# Altium PCB PCB1.PcbDoc (part 3 of 4)
Units mm, origin at the board's own origin, x right, y up, seen from the top; angles counter-clockwise.
Board outline 200 x 55 mm, 4 copper layers (Top Layer, Power Layer, GND Layer, Bottom Layer), stack 1.714 mm thick; 404 components, 268 nets, 1339 pads, 777 vias.
Unrouted connection lines stored in the file: 18.
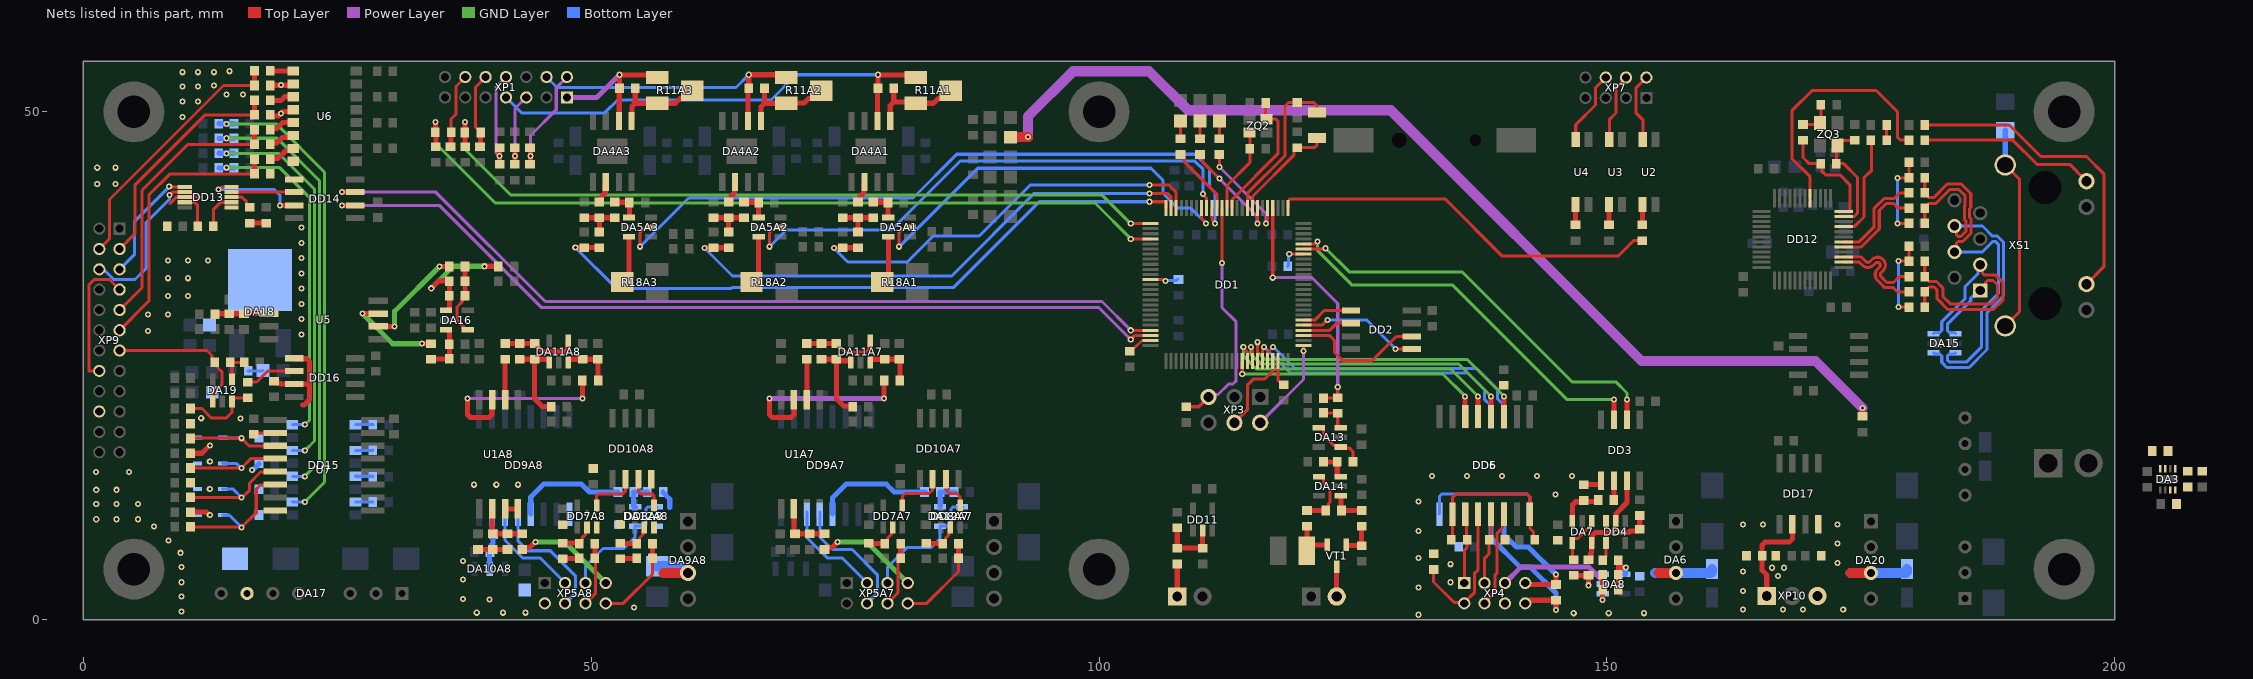
[diagram p5: the nets of this part, all layers, seen from the top]

## Via types
v1: diameter 0.6, hole 0.3, Top Layer to Bottom Layer, tented both sides, 735 vias
v2: diameter 0.6, hole 0.3, Top Layer to Bottom Layer, 36 vias
v3: diameter 0.8, hole 0.4, Top Layer to Bottom Layer, tented both sides, 4 vias
v4: diameter 0.2, hole 0.1, Top Layer to Bottom Layer, 2 vias

## Nets (pads, with @x,y where several pads share a name; then routed paths per layer and width w, separated by ;. In a path a pad name is that pad's centre, name@x,y a point inside that pad or via, vN(x,y) a via of type N, cw(c..) or ccw(c..) an arc to the next point about the centre after c; other vN are vias at no path point) (continued)
GND_DRVA8: C52A8.2 C53A8.2 C54A8.2 C55A8.1 C57A8.2 C58A8.2 C59A8.2 C62A8.1 C63A8.2 C64A8.2 C66A8.2 C67A8.2 C70A8.2 DA9A8.3 DA10A8.2 DA12A8.5 DD7A8.3 DD8A8.3 DD9A8.9 DD9A8.15 DD10A8.4 R31A8.1 R32A8.1 R36A8.2 U1A8.3 U1A8.4 XP5A8.2 | length 20.6
  Top Layer w0.5: C54A8.2@38.875,6.925 C55A8.1@40.325,6.925 R36A8.2@41.775,6.925 ; U1A8.3@41.535,10.925 U1A8.4@42.81,10.925 ; C52A8.2@47.225,6 47.25,6.025 48.8,6.025 R31A8.1@48.825,6.05 ; C53A8.2@52.875,6 52.9,6.025 54.475,6.025 R32A8.1@54.5,6.05
  Top Layer w1: 57.125,4.615 DA9A8.3@59.55,4.615
  Bottom Layer w0.5: DA10A8.2@40.025,5.025 40.025,5.1 C67A8.2@40.025,6.65 ; C67A8.2@40.05,6.725 C67A8.2@40.05,6.675 40.225,6.85 40.225,7.409 40.34,7.524 C64A8.2@40.34,8.36 ; DD9A8.15@40.26,10.4 40.26,8.44 C64A8.2@40.34,8.36 ; C64A8.2@40.375,8.325 C64A8.2@40.34,8.36 ; C64A8.2@40.4,8.425 40.34,8.365 C64A8.2@40.34,8.36 ; C66A8.2@57.1,12.575 57.1,12.525 57.75,11.875 57.75,11.075
  Bottom Layer w1: C57A8.2@56.525,5.275 58.728,5.275 59.388,4.615 DA9A8.3@59.55,4.615
  other v1: 38.75,0.7 41.325,0.7 43.55,0.7 54.225,1.2 40.025,2 37.4,2.05 37.4,3.95 37.4,5.775 49.6,10.475 38.5,13.3 40.675,13.3 42.825,13.3
GND_FS: C120.2 C121.2 C122.2 DA20.3 DD17.4 R121.2 XP10.3 | length 7.9
  Top Layer w1: 173.975,4.615 DA20.3@175.975,4.615
  Bottom Layer w1: 173.975,4.615 DA20.3@175.975,4.615 179.425,4.615 179.525,4.715 C122.2@179.525,5
  other v1: 163.375,1.025 167.325,1.025 169.3,1.025 173.25,1.025 163.375,2.85 166.825,4.3 163.375,4.775 166.25,5.125 167.425,5.125 172.7,5.6 172.7,7.5 163.375,9.375 165.35,9.375 172.7,9.375
GND_HW: C95.2 C96.2 C100.2 C101.2 C111.1 C112.2 C113.2 C114.2 DA17.7 DA18.2 DD13.1 DD13.8 DD14.5 DD15.2 DD15.8 DD16.5 DD16.7 R72.1 R73.1 R75.1 R76.1 R78.1 R79.1 R80.1 R82.1 R113.1 R115.1 R116.1 R117.1 R119.1 R120.1 U6.2 U6.4 U6.6 U6.8 VD4.2 VD5.2 VD6.2 VD7.2 XP9.7 XP9.16 XP9.20 | length 46.5
  Top Layer w0.3: XP9.16@1.6,24.5 0.6,24.5 0.6,33 1.1,33.5 2.6,33.5 XP9.7@3.6,32.5 ; 8.575,41 9.175,41.6 11.443,41.6 ; C101.2@16.764,18.4 DD15.2@18.9,18.4 ; R72.1@18.404,52.621 18.534,52.75 U6.2@20.68,52.75 U6.2@20.53,52.6
  Top Layer w0.5: R82.1@10.575,10.6 12.168,10.6 12.448,10.32 v1(12.475,10.32) ; R76.1@10.575,16.4 11.698,16.4 v1(12.477,17.179) ; C96.2@16.425,39.05 C100.2@18.025,39.05 ; R78.1@18.425,46.65 18.425,46.75 18.6,46.925 19.075,46.925 19.615,47.465 20.475,47.465 U6.6@20.68,47.67 ; R75.1@18.425,49.6 19.223,49.6 v1(19.475,49.85) 19.503,49.851 19.706,50.054 20.524,50.054 U6.4@20.68,50.21 ; R72.1@18.425,52.6 U6.2@20.53,52.6 ; C112.2@18.8,23.5 18.975,23.325 19.328,23.325 19.453,23.2 DD16.7@20.8,23.2 22.3,23.2 ; DD16.5@20.8,25.75 20.85,25.7 22.007,25.7 22.3,25.407 22.3,23.2 ; 21.582,21.125 21.741,21.125 22.3,21.684 22.3,23.2
  Bottom Layer w0.3: C113.2@16.25,24.5 17.665,24.5 C111.1@17.7,24.535
  Bottom Layer w0.5: v1(16.621,14.75) 16.64,14.769 16.744,14.769 17.325,15.35 R117.1@17.325,15.4
  other v1: 9.7,0.8 9.7,2.3 9.7,3.7 9.7,5.2 9.6,6.6 8.4,7.8 7,9.2 1.3,9.9 3.3,9.9 5.4,9.9 1.3,11.4 3.3,11.4 5.4,11.4 1.3,12.8 3.3,12.8 12.475,12.86 1.283,14.55 4.537,14.55 12.475,15.575 15.5,19.8 11.632,19.845 21.502,28.1 6.4,28.425 21.502,29.6 6.4,30.05 8.35,30.05 21.502,31.1 8.35,31.875 10.331,31.875 21.502,32.6 8.35,33.625 10.331,33.625 21.502,34.1 8.35,35.35 10.331,35.35 12.312,35.35 21.502,35.6 21.502,37.1 21.502,38.6 1.4,42.9 3.2,42.9 1.4,44.5 3.2,44.5 9.8,49.5 9.8,51 11.3,51 14.1,51.7 15.75,51.7 9.8,52.5 11.3,52.5 12.9,52.6 19.475,52.625 9.8,53.9 11.3,53.9 12.9,53.9 14.4,54
GND_PS: C40.2 C41.2 C44.2 C45.2 C46.2 C47.2 C48.2 C49.2 DA6.3 DA7.5 DA8.2 DD3.5 DD4.3 DD5.2 DD5.8 DD6.9 DD6.16 R26.1 R27.2 R28.1 R29.1 XP4.6 | length 47.4
  Top Layer w0.3: R26.1@134.681,7.875 134.776,7.971 DD5.2@134.776,10.41 134.776,12.013 135.163,12.4 142.124,12.4 142.396,12.128 DD5.8@142.396,10.41 142.424,10.382 142.424,8.985 142.781,8.628 C47.2@142.781,8.325 ; C47.2@142.881,8.15 C47.2@143.156,7.875
  Top Layer w0.5: C44.2@147.725,13.3 149.275,13.3 149.425,13.45 DD3.5@149.425,13.7 ; R27.2@148.175,5.925 148.225,5.925 148.4,6.1 148.4,6.535 148.475,6.61 148.475,7.55 DA7.5@148.5,7.575 ; DA7.5@148.525,7.6 148.525,8.275 148.85,8.6 152.116,8.6 152.266,8.75 153.05,8.75 C45.2@153.225,8.925 C40.2@153.225,10.275
  Top Layer w1: 155.081,4.62 DA6.3@156.781,4.62
  Bottom Layer w0.3: DD6.16@133.506,10.41 133.506,12.15 133.756,12.4 142.124,12.4 142.396,12.128 DD6.9@142.396,10.41
  Bottom Layer w1: 154.75,4.6 154.77,4.62 DA6.3@156.781,4.62 160.25,4.62 160.35,4.72 C41.2@160.35,5
  other v1: 131.45,0.5 146.725,0.65 150.175,0.65 153.625,0.65 131.45,3.2 134.6,3.7 134.6,5.475 131.45,6.1 150.875,8.6 131.45,8.75 131.45,11.65 144.95,12.35 132.775,14.175 136.225,14.175 139.675,14.175 143.125,14.175 146.575,14.175
GUIDE_LAS: DD1.4 R44.2 R45.1 | length 25.1
  Top Layer w0.3: v1(117.1,33.675) DD1.4@117.1,40.525 ; R44.2@122.375,21.825 123.725,21.825 123.5,22.05 v1(123.5,22.9)
  Power Layer w0.3: v1(117.1,33.675) 120.966,33.675 123.5,31.141 v1(123.5,22.9)
IL1_HW: R72.2 R85.1 XP9.4 | length 25.8
  Top Layer w0.3: XP9.4@1.6,36.5 2.6,37.5 2.6,41.376 13.824,52.6 R72.2@16.949,52.6
  Top Layer w0.5: R72.2@16.875,52.6 R85.1@16.875,54.1
IL2_HW: R75.2 R86.1 XP9.3 | length 23
  Top Layer w0.3: XP9.3@3.6,36.5 5.1,38 5.1,42.77 12.03,49.7 R75.2@16.875,49.7
  Top Layer w0.5: R75.2@16.875,49.6 R86.1@16.875,51.1
KEY_HW: R78.2 R87.1 XP9.9 | length 26.9
  Top Layer w0.3: XP9.9@3.6,30.5 5.8,32.7 5.8,42.279 10.321,46.8 R78.2@16.875,46.8
  Top Layer w0.5: R78.2@16.875,46.8 R87.1@16.875,48.1
LED1: DD1.15 R8.1 | length 6.8
  Top Layer w0.3: R8.1@108.025,45.8 108.068,45.8 108.343,45.525 108.343,45.144 111.6,41.887 DD1.15@111.6,40.525
LED2: DD1.7 R9.1 | length 10.6
  Top Layer w0.3: R9.1@109.935,45.8 110.173,45.562 110.173,45.102 v1(111.85,43.425) ; v1(115.6,39.025) DD1.7@115.6,40.525
  Power Layer w0.3: v1(111.85,43.425) 115.543,39.732 115.543,39.082 v1(115.6,39.025)
LED3: DD1.5 R10.1 | length 10.2
  Top Layer w0.3: v1(111.85,44.575) R10.1@111.85,45.8 ; v1(116.425,39.025) 116.425,39.106 116.6,39.281 DD1.5@116.6,40.525
  Power Layer w0.3: v1(111.85,44.575) 116.425,40 v1(116.425,39.025)
LNKn: DD12.17 R66.2 | length 25.2
  Top Layer w0.3: DD12.17@170,41.5 170,43.6 168.2,45.4 168.2,50.1 170.2,52.1 176.5,52.1 178.6,50 178.6,47.5 178.888,47.212 R66.2@179.725,47.212
MEM_CS: DD1.81 DD2.1 | length 5.1
  Top Layer w0.3: DD1.81@120.125,29.5 121.225,29.5 122.171,30.446 DD2.1@124.796,30.446
MEM_MISO: DD1.79 DD2.2 | length 5
  Top Layer w0.3: DD1.79@120.125,28.5 122.699,28.5 123.394,29.196 DD2.2@124.796,29.196
MEM_MOSI: DD1.80 DD2.5 | length 12.1
  Top Layer w0.3: DD1.80@120.125,29 121.939,29 122.464,29.525 v1(122.475,29.525) ; v1(129.2,26.65) 129.202,26.648 130.793,26.648 DD2.5@130.796,26.646
  Bottom Layer w0.3: v1(122.475,29.525) 126.325,29.525 v1(129.2,26.65)
MEM_SCLK: DD1.78 DD2.6 | length 13.4
  Top Layer w0.3: DD1.78@120.125,28 122.662,28 123.178,27.484 123.178,26.306 123.984,25.5 126.874,25.5 129.269,27.896 DD2.6@130.796,27.896
MP_EN_HW: R80.2 R88.1 XP9.11 | length 27.3
  Top Layer w0.3: XP9.11@3.6,28.5 6.5,31.4 6.5,41.83 8.57,43.9 R80.2@16.875,43.9
  Top Layer w0.5: R80.2@16.875,43.8 R80.2@16.875,43.9 R88.1@16.875,45.35
NetC6_1: C6.1 DA3.3
NetC7_1: C7.1 DA3.8
NetC7_2: C7.2 DA3.7
NetC9_1: C9.1 DA3.4 L3.1 R3.2 | length 102.3
  Top Layer w0.5: C9.1@175.15,20.025 v1(175.15,20.85)
  Top Layer w1: L3.1@91.275,47.5 91.3,47.525 v1(93,47.525)
  Power Layer w1: v1(93,47.525) 93,49.55 97.45,54 104.925,54 108.775,50.15 128.725,50.15 153.4,25.475 170.525,25.475 v1(175.15,20.85)
NetC16_1: C16.1 DD1.49 | length 2.5
  Top Layer w0.3: C16.1@103.025,26.45 103.3,26.725 103.451,26.725 104.226,27.5 DD1.49@105.075,27.5
NetC19_1: C19.1 DD1.73 | length 2.7
  Top Layer w0.3: DD1.73@117.6,25.475 117.6,23.601 117.776,23.425 117.875,23.425 118.2,23.1 C19.1@118.2,23.075
NetC28A1_1: C28A1.1 DA4A1.1 R11A1.2 R11A1.3 | length 9.5
  Top Layer w0.5: DA4A1.1@79.45,49.105 79.45,50.63 79.8,50.98 ; C28A1.1@79.8,52.325 79.8,50.98 ; R11A1.2@85.4,52.075 84.65,51.325 84.185,51.325 83.71,50.85 R11A1.3@81.95,50.85 81.82,50.98 79.8,50.98
NetC28A2_1: C28A2.1 DA4A2.1 R11A2.2 R11A2.3 | length 9.5
  Top Layer w0.5: DA4A2.1@66.716,49.105 66.724,49.113 66.724,50.499 67.075,50.85 ; C28A2.1@67.075,52.325 67.075,50.85 ; R11A2.2@72.675,52.075 71.925,51.325 71.425,51.325 70.959,50.859 69.234,50.859 R11A2.3@69.225,50.85 67.075,50.85
NetC28A3_1: C28A3.1 DA4A3.1 R11A3.2 R11A3.3 | length 9.5
  Top Layer w0.5: DA4A3.1@54,49.105 54.05,49.155 54.05,50.575 54.12,50.645 54.19,50.715 54.35,50.875 ; C28A3.1@54.35,52.325 54.35,50.875 ; R11A3.2@59.975,52.075 59.225,51.325 58.775,51.325 58.3,50.85 R11A3.3@56.525,50.85 54.35,50.85 54.35,50.875
NetC34A1_1: C34A1.1 DA5A1.1 R17A1.2 | length 3.1
  Top Layer w0.5: R17A1.2@77.775,41.125 77.8,41.1 79.2,41.1 C34A1.1@79.225,41.075 79.225,39.625 DA5A1.1@79.25,39.6 DA5A1.1@79.4,39.6
NetC34A2_1: C34A2.1 DA5A2.1 R17A2.2 | length 3.1
  Top Layer w0.5: R17A2.2@65.05,41.125 65.075,41.1 66.475,41.1 C34A2.1@66.5,41.075 66.5,39.625 66.525,39.6 DA5A2.1@66.65,39.6
NetC34A3_1: C34A3.1 DA5A3.1 R17A3.2 | length 3
  Top Layer w0.5: R17A3.2@52.325,41.125 52.35,41.1 C34A3.1@53.9,41.1 ; DA5A3.1@53.775,39.625 C34A3.1@53.775,41.075
NetC44_1: C44.1 DA7.3 R21.2 | length 4.5
  Top Layer w0.5: DA7.3@146.6,9.725 146.6,11.329 146.893,11.621 147.596,11.621 C44.1@147.725,11.75 ; C44.1@147.575,11.65 149.1,11.65 R21.2@149.125,11.675
NetC50_1: C50.1 DA8.4 R24.1 R30.2 | length 4.3
  Top Layer w0.5: C50.1@151.125,2.975 R24.1@151.125,5.868 ; 151.168,5.15 v1(151.85,5.15)
  Bottom Layer w0.5: DA8.4@151.725,4.475 151.806,4.475 151.831,4.5 151.831,5.131 v1(151.85,5.15)
NetC50_2: C50.2 DA8.1 R30.1 XP4.5 | length 15.8
  Top Layer w0.5: v1(149.575,1.95) C50.2@149.575,2.975 R30.1@149.575,4.425
  Power Layer w0.5: XP4.5@139.95,3.625 141.509,5.184 148.223,5.184 149.575,3.832 v1(149.575,1.95)
  Bottom Layer w0.5: v1(149.575,1.95) DA8.1@149.575,2.575
NetC52A7_1: C52A7.1 DD7A7.2 R34A7.2 | length 3.5
  Top Layer w0.3: R34A7.2@78.925,7.5 79.2,7.775 79.2,8.045 79.575,8.42 79.575,8.975 DD7A7.2@79.7,9.1
  Top Layer w0.5: C52A7.1@77.325,7.55 77.35,7.525 R34A7.2@78.9,7.525
NetC52A8_1: C52A8.1 DD7A8.2 R34A8.2 | length 3.5
  Top Layer w0.3: R34A8.2@48.775,7.55 R34A8.2@48.825,7.5 49.1,7.775 49.1,8.042 49.475,8.417 49.475,8.975 DD7A8.2@49.6,9.1
  Top Layer w0.5: C52A8.1@47.225,7.55 R34A8.2@48.775,7.55
NetC53A7_1: C53A7.1 DD8A7.2 R35A7.2 | length 3.6
  Top Layer w0.3: R35A7.2@84.625,7.5 84.9,7.775 84.9,8.062 85.25,8.412 85.25,8.975 DD8A7.2@85.375,9.1
  Top Layer w0.5: C53A7.1@83,7.55 83.025,7.525 84.6,7.525 R35A7.2@84.625,7.5
NetC53A8_1: C53A8.1 DD8A8.2 R35A8.2 | length 3.6
  Top Layer w0.3: R35A8.2@54.5,7.5 54.775,7.775 54.775,8.055 55.125,8.405 55.125,8.975 DD8A8.2@55.225,9.075
  Top Layer w0.5: C53A8.1@52.875,7.55 52.9,7.525 54.475,7.525 R35A8.2@54.5,7.5 ; DD8A8.2@55.225,9.075 DD8A8.2@55.25,9.1
NetC55A7_2: C55A7.2 R33A7.1 R36A7.1 U1A7.2 | length 5.5
  Top Layer w0.5: U1A7.2@69.975,11.1 69.975,8.475 71.425,8.475 R33A7.1@72.875,8.475
NetC55A8_2: C55A8.2 R33A8.1 R36A8.1 U1A8.2 | length 5.4
  Top Layer w0.5: U1A8.2@40.26,10.925 40.26,8.54 C55A8.2@40.325,8.475 R36A8.1@41.775,8.475 R33A8.1@43.225,8.475
NetC61A7_1: C61A7.1 DA11A7.3 R38A7.2 R40A7.1 | length 5.2
  Top Layer w0.5: DA11A7.3@77.475,25.325 77.475,25.525 77.6,25.65 R40A7.1@78.9,25.65 C61A7.1@80.35,25.65 80.4,25.6 R38A7.2@80.4,23.55
NetC61A8_1: C61A8.1 DA11A8.3 R38A8.2 R40A8.1 | length 5.2
  Top Layer w0.5: DA11A8.3@47.775,25.325 47.775,25.525 47.9,25.65 R40A8.1@49.2,25.65 C61A8.1@50.65,25.65 50.7,25.6 R38A8.2@50.7,23.55
NetC66A7_1: C66A7.1 DA12A7.3 R41A7.2 | length 2.8
  Bottom Layer w0.5: DA12A7.3@84.375,11.15 R41A7.2@84.375,12.575 ; R41A7.2@84.475,12.575 C66A7.1@85.825,12.575
NetC66A8_1: C66A8.1 DA12A8.3 R41A8.2 | length 2.9
  Bottom Layer w0.5: DA12A8.3@54.35,11.125 54.225,11.125 54.2,11.15 R41A8.2@54.2,12.575 C66A8.1@55.55,12.575
NetC69A7_1: C69A7.1 DA11A7.4 R39A7.2 R42A7.2 | length 7.5
  Top Layer w0.3: R42A7.2@74.191,27.2 74.466,26.925 74.466,26.875 74.972,26.369 77.069,26.369 77.369,26.669 77.369,27.369 DA11A7.4@77.475,27.475
  Top Layer w0.5: R39A7.2@71.241,27.2 C69A7.1@72.691,27.2 R42A7.2@74.191,27.2
NetC69A7_2: C69A7.2 DA11A7.1 R42A7.1 R43A7.1 | length 8.9
  Top Layer w0.5: C69A7.2@72.691,25.65 R42A7.1@74.141,25.65 ; DA11A7.1@75.575,25.325 75.575,25.478 75.55,25.503 74.288,25.503 R42A7.1@74.141,25.65 ; R43A7.1@75.75,20.975 75.688,21.037 74.868,21.037 74.141,21.764 R42A7.1@74.141,25.65
NetC69A8_1: C69A8.1 DA11A8.4 R39A8.2 R42A8.2 | length 7.5
  Top Layer w0.5: R39A8.2@41.548,27.188 C69A8.1@42.998,27.188 ; C69A8.1@43.01,27.2 R42A8.2@44.5,27.2 ; R42A8.2@44.45,27.2 R42A8.2@44.5,27.2 ; DA11A8.4@47.775,27.475 47.75,27.45 47.75,26.718 47.457,26.425 45.225,26.425 44.675,26.975 44.675,27.025 R42A8.2@44.5,27.2
NetC69A8_2: C69A8.2 DA11A8.1 R42A8.1 R43A8.1 | length 9
  Top Layer w0.5: C69A8.2@43,25.65 R42A8.1@44.45,25.65 ; DA11A8.1@45.875,25.325 45.875,25.525 45.75,25.65 R42A8.1@44.45,25.65 ; R43A8.1@46.075,20.975 46.053,20.997 45.193,20.997 44.45,21.74 R42A8.1@44.45,25.65
NetC72_1: C72.1 DA13.3 R45.2 | length 2.8
  Top Layer w0.3: C72.1@122.375,20.35 R45.2@123.5,20.35 ; R45.2@123.5,20.325 123.5,19.038 123.625,18.913 DA13.3@123.787,18.913
NetC75_1: C75.1 DA14.1 R48.1 | length 3.5
  Top Layer w0.5: DA14.1@123.8,12.2 123.8,10.828 C75.1@123.871,10.757 R48.1@125.85,10.757 R48.1@125.871,10.757
NetC75_2: C75.2 DA14.4 R49.1 | length 6.1
  Top Layer w0.3: DA14.4@121.65,14.207 121.975,14.207 122.1,14.082 122.1,13.907 122.1,13.5 122.731,12.869 122.731,11.583 122.596,11.447 122.596,11.032 C75.2@122.321,10.757
  Top Layer w0.5: R49.1@120.471,10.757 C75.2@122.321,10.757
NetC76_1: C76.1 DD11.2 R55.2 R56.1 | length 6.3
  Top Layer w0.5: R56.1@107.7,9.05 R55.2@107.7,7.05 C76.1@110.2,7.05 DD11.2@110.2,8.8
NetC79_1: C79.1 XS1.13 XS1.14 | length 20.4
  Top Layer w0.3: XS1.13@189.2,28.932 190.6,30.332 190.6,43.372 XS1.14@189.2,44.772
  Bottom Layer w0.5: XS1.14@189.2,44.772 C79.1@189.2,48.2
NetC81_1: C81.1 R57.2 R58.2 | length 8.1
  Top Layer w0.3: v1(178.7,30.8) 179.703,30.8 R57.2@179.725,30.778 ; v1(178.7,35.3) 179.703,35.3 R58.2@179.725,35.278 C81.1@179.725,36.778
  Bottom Layer w0.3: v1(178.7,30.8) v1(178.7,35.3)
NetC82_1: C82.1 R59.2 R60.2 | length 8.3
  Top Layer w0.3: v1(178.6,39) 179.7,39 R59.2@179.725,39.025 ; v1(178.6,43.5) 179.7,43.5 R60.2@179.725,43.525 C82.1@179.725,45.025
  Bottom Layer w0.3: v1(178.6,39) v1(178.6,43.5)
NetC86_1: C86.1 R70.2 ZQ3.3 | length 3.6
  Top Layer w0.3: R70.2@169.3,48.75 170.825,48.75 ZQ3.3@170.975,48.9 171.05,48.975 C86.1@171.05,50.7
NetC96_1: C96.1 DD13.3 | length 2.4
  Top Layer w0.3: DD13.3@14.6,41.6 15.648,41.6 16.1,41.148 16.1,40.875 16.375,40.6 C96.1@16.425,40.6
NetC98_2: C98.2 R77.1 R81.1 U5.2 | length 5.3
  Top Layer w0.5: R77.1@12.991,30.075 13.041,30.125 R81.1@14.341,30.125 ; R81.1@14.391,30.125 C98.2@15.841,30.125 ; C98.2@15.866,30.15 U5.2@18.3,30.15
NetC99_1: C99.1 DD13.9 | length 3.4
  Top Layer w0.3: DD13.9@10,41.1 10.975,41.1 11.275,40.8 C99.1@11.275,38.75
NetC99_2: C99.2 DD13.2 | length 3.7
  Top Layer w0.3: C99.2@12.825,38.75 12.825,40.364 13.561,41.1 DD13.2@14.6,41.1
NetC103_1: C103.1 DA16.3 R93.2 R97.1 | length 5
  Top Layer w0.5: R93.2@34.25,25.632 34.275,25.657 36.025,25.657 C103.1@36.05,25.682 R97.1@36.05,27.132 36.05,28.532 36.025,28.557 DA16.3@35.725,28.557
NetC107_1: C107.1 DA16.4 R95.2 R98.2 | length 7.2
  Top Layer w0.3: R98.2@37.6,31.882 37.325,31.607 37.325,31.316 36.8,30.791 36.8,29.532 37.425,28.907 37.425,28.682 37.55,28.557 DA16.4@37.875,28.557
  Top Layer w0.5: R98.2@37.6,31.882 C107.1@37.6,33.332 R95.2@37.6,34.782
NetC107_2: C107.2 DA16.1 R98.1 R99.1 | length 12.7
  Top Layer w0.3: R99.1@40.857,34.8 R99.1@40.875,34.782
  Top Layer w0.5: v1(34.275,32.632) 34.975,33.332 C107.2@36.05,33.332 R98.1@36.05,31.882 36.05,30.582 35.925,30.457 DA16.1@35.725,30.457 ; v1(39.5,34.8) R99.1@40.857,34.8
  GND Layer w0.5: v1(34.275,32.632) 36.443,34.8 v1(39.5,34.8)
NetC115_1: C115.1 DA19.3 R104.2 | length 7.4
  Top Layer w0.3: C115.1@10.575,20.8 11.7,20.8 12.65,19.85 14.075,19.85 14.658,20.433 DA19.3@14.658,21.5 ; DA19.3@14.658,21.725 14.783,21.85 R104.2@16.2,21.85
NetDA3_5: DA3.5 R3.1 R4.2
NetDA4A1_6: DA4A1.6 R14A1.1 | length 2.2
  Top Layer w0.5: R14A1.1@76.358,41.158 76.5,41.3 76.5,41.701 76.85,42.051 76.85,43.055 DA4A1.6@76.9,43.105
NetDA4A2_6: DA4A2.6 R14A2.1 | length 2.3
  Top Layer w0.5: R14A2.1@63.55,41.125 63.725,41.3 63.775,41.3 63.775,41.701 64.116,42.042 64.116,43.056 DA4A2.6@64.166,43.106
NetDA4A3_6: DA4A3.6 R14A3.1 | length 2.3
  Top Layer w0.5: R14A3.1@50.825,41.125 50.875,41.125 51.05,41.3 51.05,41.687 51.4,42.037 51.4,43.055 DA4A3.6@51.45,43.105
NetDA5A1_3: DA5A1.3 R18A1.2 | length 4.1
  Top Layer w0.5: R18A1.2@79,33.675 79.3,33.975 DA5A1.3@79.3,37.7
NetDA5A2_3: DA5A2.3 R18A2.2 | length 4.8
  Top Layer w0.5: R18A2.2@65.836,33.186 66.5,33.85 DA5A2.3@66.5,37.7
NetDA5A3_3: DA5A3.3 R18A3.2 | length 4.8
  Top Layer w0.5: R18A3.2@53.075,33.25 53.175,33.25 53.75,33.825 DA5A3.3@53.75,37.7
NetDA7_1: DA7.1 DA7.4 R23.2 | length 4.9
  Top Layer w0.3: R23.2@146.725,5.925 146.6,6.05 146.6,7.9 146.725,8.025 147.149,8.025 148.375,9.251 148.375,9.6 DA7.1@148.5,9.725
NetDA8_3: DA8.3 R23.1 R27.1 | length 4.6
  Top Layer w0.5: R23.1@146.625,4.375 R23.1@146.725,4.375 R27.1@148.125,4.375 ; v1(148.175,3.4) R27.1@148.175,4.375
  Bottom Layer w0.3: v1(148.175,3.4) 148.175,3.9 148.707,4.432 149.532,4.432 DA8.3@149.575,4.475
NetDA12A7_1: DA12A7.1 DA12A7.4 XP5A7.5 | length 12.9
  Bottom Layer w0.3: XP5A7.5@79.175,3.625 79.175,5.175 81.134,7.134 83.484,7.134 84.35,8 DA12A7.1@84.35,9.225 ; DA12A7.1@84.475,9.225 85.251,9.225 85.427,9.401 85.427,10.912 85.603,11.088 86.588,11.088 DA12A7.4@86.606,11.106
NetDA12A8_1: DA12A8.1 DA12A8.4 XP5A8.5 | length 12.7
  Bottom Layer w0.3: XP5A8.5@49.45,3.625 49.45,5.301 51.174,7.024 53.229,7.024 54.35,8.145 DA12A8.1@54.35,9.225 55.252,9.225 55.428,9.401 55.428,10.949 55.604,11.125 DA12A8.4@56.5,11.125
NetDA13_1: DA13.1 DA13.4 R46.1 | length 5.7
  Top Layer w0.3: DA13.4@121.637,18.913 121.954,18.913 122.079,18.788 122.079,18.196 123.137,17.138 123.662,17.138 DA13.1@123.787,17.013 123.868,16.933 124.618,16.933 124.987,16.563 ; R46.1@125,15.55 125,16.563
NetDA14_3: DA14.3 R46.2 R47.1 | length 3.1
  Top Layer w0.5: R47.1@122.1,15.55 R46.2@123.45,15.55 123.45,14.125 123.475,14.1 DA14.3@123.8,14.1
NetDA19_4: DA19.4 R114.2 R118.1 | length 3.2
  Top Layer w0.3: DA19.4@14.658,23.65 14.658,25.197 R118.1@14.505,25.35 15.949,25.35 R114.2@15.966,25.333
NetDD1_37: DD1.37 R6.1 | length 2.8
  Top Layer w0.3: DD1.37@105.075,33.5 106.302,33.5 106.452,33.35 v1@106.529,33.35
  Bottom Layer w0.3: v1@106.529,33.35 106.586,33.407 107.611,33.407 R6.1@107.759,33.556
  other v1: 106.525,33.35
NetDD1_94: DD1.94 R7.1 | length 2.7
  Top Layer w0.3: v1(118.725,36) 119.5,36 DD1.94@120.125,36
  Bottom Layer w0.3: R7.1@118.575,34.8 118.65,34.875 118.65,35.925 v1(118.725,36)
NetDD3_6: DD3.6 R21.1 | length 2
  Top Layer w0.5: R21.1@150.675,11.7 DD3.6@150.675,13.7
NetDD3_7: DD3.7 DD4.2 | length 4.4
  Top Layer w0.5: DD4.2@150.85,9.725 150.875,9.75 150.875,10.45 151.975,11.55 DD3.7@151.975,13.7
NetDD4_4: DD4.4 R24.2 | length 1.8
  Top Layer w0.3: R24.2@149.625,5.925 149.9,6.2 DD4.4@149.9,7.575
NetDD5_3: DD5.3 R26.2 XP4.1 | length 6.9
  Top Layer w0.3: XP4.1@135.956,3.7 135.956,6.85 136.231,7.124 R26.2@136.231,7.875 136.184,7.922 136.184,10.272 DD5.3@136.046,10.41
NetDD5_4: DD5.4 R28.2 XP4.2 | length 14.4
  Top Layer w0.3: R28.2@132.931,4.95 132.931,3.725 134.956,1.7 135.956,1.7 136.98,2.724 136.98,4.599 137.316,4.935 DD5.4@137.316,10.41
NetDD5_5: DD5.5 R29.2 XP4.3 | length 7
  Top Layer w0.3: XP4.3@137.956,3.7 137.956,6.075 138.406,6.525 R29.2@138.406,7.875 138.586,8.055 DD5.5@138.586,10.41
NetDD5_6: DD5.6 XP4.4 | length 9.5
  Top Layer w0.3: XP4.4@137.956,1.7 138.956,2.7 138.956,4.4 139.185,4.629 139.185,8.527 139.706,9.049 139.706,10.26 DD5.6@139.856,10.41
NetDD6_11: DD6.11 R25.1 XP4.7 | length 12.8
  Top Layer w0.5: XP4.7@141.95,3.625 142.084,3.491 142.577,3.491 142.593,3.475 R25.1@144.925,3.475 ; R25.1@144.975,3.475 v1(144.975,4.45)
  Bottom Layer w0.5: DD6.11@139.856,10.41 DD6.11@139.856,10.4 139.856,8.375 141.081,7.15 142.275,7.15 v1(144.975,4.45)
NetDD6_12: DD6.12 R25.2 XP4.8 | length 16.8
  Top Layer w0.5: XP4.8@141.95,1.625 142.139,1.625 142.439,1.925 R25.2@144.975,1.925 v1(144.975,0.95)
  Bottom Layer w0.5: DD6.12@138.586,10.41 DD6.12@138.586,10.4 138.586,8.043 141.455,5.175 142.45,5.175 144.975,2.65 v1(144.975,0.95)
NetDD7A7_4: DD7A7.4 DD10A7.2 | length 5.3
  Top Layer w0.3: DD7A7.4@80.65,11.25 80.65,12.164 80.911,12.425 83.275,12.425 83.625,12.775 DD10A7.2@83.625,13.975
NetDD7A8_4: DD7A8.4 DD10A8.2 | length 5.2
  Top Layer w0.3: DD7A8.4@50.55,11.25 50.55,12.224 50.726,12.4 53.119,12.4 53.375,12.656 DD10A8.2@53.375,13.85
NetDD8A7_4: DD8A7.4 DD10A7.3 | length 3.7
  Top Layer w0.3: DD10A7.3@84.925,13.975 84.925,12.791 85.291,12.425 86.03,12.425 86.325,12.13 DD8A7.4@86.325,11.25
NetDD8A8_4: DD8A8.4 DD10A8.3 | length 3.9
  Top Layer w0.3: DD10A8.3@54.675,13.85 54.675,12.65 54.925,12.4 56.024,12.4 56.2,12.224 DD8A8.4@56.2,11.25
NetDD9A7_12: DD9A7.12 R41A7.1 | length 11.6
  Bottom Layer w0.5: DD9A7.12@73.785,10.4 73.785,12.043 75.092,13.35 79.062,13.35 79.837,12.575 R41A7.1@82.925,12.575
NetDD9A7_13: DD9A7.13 XP5A7.4 | length 12.9
  Bottom Layer w0.3: DD9A7.13@72.515,10.6 72.515,8.16 73.75,6.925 75.7,6.925 78.175,4.45 78.175,2.625 XP5A7.4@77.175,1.625
NetDD9A7_14: DD9A7.14 XP5A7.3 | length 10.3
  Bottom Layer w0.3: DD9A7.14@71.245,10.6 71.245,8.105 73.25,6.1 74.7,6.1 XP5A7.3@77.175,3.625
NetDD9A8_12: DD9A8.12 R41A8.1 | length 11.1
  Bottom Layer w0.5: DD9A8.12@44.07,10.4 44.07,12.091 45.329,13.35 49.069,13.35 49.844,12.575 R41A8.1@52.65,12.575
NetDD9A8_13: DD9A8.13 XP5A8.4 | length 12.7
  Bottom Layer w0.3: DD9A8.13@42.801,10.299 42.801,7.774 43.775,6.8 46,6.8 48.45,4.35 48.45,2.625 XP5A8.4@47.45,1.625
NetDD9A8_14: DD9A8.14 XP5A8.3 | length 10.2
  Bottom Layer w0.3: DD9A8.14@41.53,10.4 41.53,7.819 43.249,6.1 44.975,6.1 XP5A8.3@47.45,3.625
NetDD12_9: DD12.9 R69.2 | length 10.2
  Top Layer w0.3: DD12.9@173.3,38.7 174.05,38.7 174.345,38.7 175.3,39.655 175.3,43.5 176.051,44.251 R69.2@176.051,47.126
NetDD13_4: DD13.4 DD14.6 | length 6.2
  Top Layer w0.3: DD13.4@14.6,42.1 DD14.6@20.8,42.1
NetDD13_5: DD13.5 DD14.7 | length 10.1
  Top Layer w0.3: v1(13.325,42.35) 13.406,42.35 13.656,42.6 DD13.5@14.6,42.6
  Top Layer w0.5: v1(19.4,40.8) DD14.7@20.8,40.8
  Bottom Layer w0.3: v1(13.325,42.35) 18.825,42.35 19.4,41.775 v1(19.4,40.8)
NetDD15_3: DD15.3 R89.2 VD7.1 | length 10.5
  Top Layer w0.3: R89.2@10.575,17.85 10.6,17.875 v1(15.6,17.875) 16.375,17.1 18.87,17.1 DD15.3@18.9,17.13
  Bottom Layer w0.3: VD7.1@13.75,17.94 13.782,17.908 15.567,17.908 v1(15.6,17.875)
NetDD15_4: DD15.4 R83.2 VD6.1 | length 10.7
  Top Layer w0.3: R83.2@10.575,14.95 v1(15.6,14.95) 16.51,15.86 DD15.4@18.9,15.86
  Bottom Layer w0.3: VD6.1@13.75,15.4 15.069,15.4 15.519,14.95 v1(15.6,14.95)
NetDD15_5: DD15.5 R90.2 VD5.1 | length 12
  Top Layer w0.3: R90.2@10.575,12.05 15.681,12.05 16.4,12.769 16.4,13.47 17.476,14.546 18.856,14.546 DD15.5@18.9,14.59
  Bottom Layer w0.3: VD5.1@13.75,12.86 14.79,12.86 v1(15.6,12.05)
NetDD15_6: DD15.6 R84.2 VD4.1 | length 13.8
  Top Layer w0.3: R84.2@10.575,9.15 15.55,9.15 v1(15.6,9.1) 17.05,10.55 17.05,12.85 17.476,13.276 18.856,13.276 DD15.6@18.9,13.32
  Bottom Layer w0.3: VD4.1@13.75,10.3 13.758,10.292 14.408,10.292 v1(15.6,9.1)
NetDD16_6: DD16.6 R104.1 | length 5.1
  Top Layer w0.3: R104.1@16.2,23.4 17.09,23.4 18.19,24.5 DD16.6@20.8,24.5
NetDD17_2: DD17.2 R121.1 XP10.1 | length 9.9
  Top Layer w0.5: XP10.1@165.725,2.35 165.725,4.425 165.275,4.875 165.275,7.357 165.568,7.65 167.946,7.65 168.239,7.943 DD17.2@168.239,9.4
NetR8_2: R8.2 VD1.1 | length 1.8
  Top Layer w0.3: R8.2@108.025,47.35 VD1.1@108.025,49.1
NetR9_2: R9.2 VD2.1 | length 1.7
  Top Layer w0.3: R9.2@109.935,47.35 VD2.1@109.935,49.1
NetR10_2: R10.2 VD3.1 | length 1.8
  Top Layer w0.3: R10.2@111.85,47.31 VD3.1@111.85,49.11
NetR14A1_2: R14A1.2 R15A1.1 R16A1.1 R17A1.1 | length 4.3
  Top Layer w0.5: R15A1.1@74.775,39.575 R14A1.2@76.275,39.575 R17A1.1@77.775,39.575 ; R16A1.1@76.275,38.175 R14A1.2@76.275,39.48
NetR14A2_2: R14A2.2 R15A2.1 R16A2.1 R17A2.1 | length 4.4
  Top Layer w0.5: R15A2.1@62.05,39.575 R14A2.2@63.525,39.575 ; R16A2.1@63.55,38.175 R14A2.2@63.55,39.575 R17A2.1@65.05,39.575
NetR14A3_2: R14A3.2 R15A3.1 R16A3.1 R17A3.1 | length 4.6
  Top Layer w0.5: R15A3.1@49.325,39.575 R14A3.2@50.825,39.575 R17A3.1@52.325,39.575 ; R16A3.1@50.825,38.175 50.825,39.525 R14A3.2@51,39.7
NetR31A7_2: R31A7.2 R34A7.1 XP5A7.6 | length 6.4
  Top Layer w0.3: XP5A7.6@79.175,1.625 80.2,2.65 80.2,5.775 R31A7.2@80.475,6.05
  Top Layer w0.5: R31A7.2@80.475,6.05 R34A7.1@80.475,7.5
NetR31A8_2: R31A8.2 R34A8.1 XP5A8.6 | length 6.3
  Top Layer w0.3: XP5A8.6@49.45,1.625 50.45,2.625 50.45,5.975 R31A8.2@50.375,6.05
  Top Layer w0.5: R31A8.2@50.375,6.05 R34A8.1@50.375,7.5
NetR32A7_2: R32A7.2 R35A7.1 XP5A7.8 | length 9
  Top Layer w0.3: XP5A7.8@81.175,1.625 83.047,1.625 86.175,4.753 R32A7.2@86.175,6.05
  Top Layer w0.5: R32A7.2@86.175,6.05 R35A7.1@86.175,7.5
NetR32A8_2: R32A8.2 R35A8.1 XP5A8.8 | length 8.8
  Top Layer w0.3: XP5A8.8@51.45,1.625 53.175,1.625 56.05,4.5 R32A8.2@56.05,6.05
  Top Layer w0.5: R32A8.2@56.05,6.05 R35A8.1@56.05,7.5
NetR33A7_2: R33A7.2 XP5A7.7 | length 10.2
  Top Layer w0.5: R33A7.2@72.975,6.925 73.15,7.1 73.7,7.1 v1@74.256,7.656
  GND Layer w0.5: v1(74.275,7.675) 77.125,7.675 XP5A7.7@81.175,3.625
NetR33A8_2: R33A8.2 XP5A8.7 | length 10.2
  Top Layer w0.5: R33A8.2@43.225,6.925 43.4,7.1 43.95,7.1 v1@44.506,7.656
  GND Layer w0.5: v1(44.525,7.675) 47.4,7.675 XP5A8.7@51.45,3.625
NetR38A7_1: R38A7.1 U1A7.7 | length 18.7
  Top Layer w0.5: v1(67.55,21.775) 67.55,20.218 67.843,19.925 69.682,19.925 69.975,20.218 U1A7.7@69.975,21.675 ; v1(78.85,21.775) R38A7.1@78.85,23.55
  Power Layer w0.5: v1@67.577,21.775 v1(78.85,21.775)
NetR38A8_1: R38A8.1 U1A8.7 | length 18.7
  Top Layer w0.5: v1(37.85,21.775) 37.85,20.218 38.143,19.925 39.967,19.925 40.26,20.218 U1A8.7@40.26,21.675 ; v1@49.15,21.795 R38A8.1@49.15,23.55
  Power Layer w0.3: v1(37.85,21.775) v1(49.15,21.775)
NetR39A7_1: R39A7.1 U1A7.6 | length 4
  Top Layer w0.5: U1A7.6@71.25,21.675 R39A7.1@71.25,25.65
NetR39A8_1: R39A8.1 U1A8.6 | length 4
  Top Layer w0.5: U1A8.6@41.548,21.675 R39A8.1@41.548,25.638
NetR48_2: R48.2 R50.2 VT1.1 | length 3.5
  Top Layer w0.5: VT1.1@124.346,7.382 124.421,7.307 R50.2@125.871,7.307 ; R50.2@125.85,7.307 R48.2@125.85,9.207
NetR49_2: R49.2 R51.2 VT1.2 | length 4.6
  Top Layer w0.5: R51.2@120.446,6.782 R51.2@120.471,6.807 ; R49.2@120.471,9.207 R51.2@120.471,6.807 ; VT1.2@122.446,7.382 121.046,7.382 R51.2@120.471,6.807
NetR52_1: R52.1 U2.1 | length 2
  Top Layer w0.5: R52.1@153.475,38.875 153.475,38.95 153.5,38.975 U2.1@153.5,40.875
NetR53_1: R53.1 U3.1 | length 2
  Top Layer w0.5: R53.1@150.2,38.875 150.2,38.95 U3.1@150.2,40.875
NetR54_1: R54.1 U4.1 | length 2
  Top Layer w0.5: R54.1@146.9,38.875 U4.1@146.9,40.875
NetR55_1: R55.1 XP8.1 | length 3.2
  Top Layer w0.5: XP8.1@107.7,2.3 R55.1@107.7,5.5
NetR63_1: R63.1 XS1.10 | length 31.2
  Top Layer w0.3: R63.1@181.275,48.712 189.588,48.712 192.7,45.6 197.2,45.6 198.9,43.9 198.9,34.74 XS1.10@197.2,33.04
NetR66_1: R66.1 XS1.12 | length 17.6
  Top Layer w0.3: R66.1@181.275,47.212 189.947,47.212 192.326,44.832 195.538,44.832 XS1.12@197.2,43.17
NetR67_2: R67.2 R69.1 | length 1.5
  Top Layer w0.3: R69.1@177.525,47.212 R67.2@177.525,48.712
NetR85_2: R85.2 U6.1 | length 2.3
  Top Layer w0.3: R85.2@18.425,54.05 R85.2@18.456,54.019
  Top Layer w0.5: R85.2@18.455,54.02 U6.1@20.68,54.02
NetR86_2: R86.2 U6.3 | length 2.4
  Top Layer w0.5: R86.2@18.425,51.1 19.475,51.1 19.88,51.505 20.655,51.505 U6.3@20.68,51.48
NetR87_2: R87.2 U6.5 | length 2.6
  Top Layer w0.5: R87.2@18.425,48.15 18.425,48.2 18.6,48.375 19.075,48.375 19.653,48.953 20.667,48.953 U6.5@20.68,48.94
NetR88_2: R88.2 U6.7 | length 2.8
  Top Layer w0.5: R88.2@18.425,45.25 R88.2@18.425,45.355 ; R88.2@18.425,45.255 18.6,45.43 19.205,45.43 19.97,46.195 20.475,46.195 U6.7@20.68,46.4
NetR93_1: R93.1 U5.7 | length 9.5
  Top Layer w0.5: v1(27.5,30.15) U5.7@29.05,30.15 ; v1(33.35,27.182) R93.1@34.25,27.182
  GND Layer w0.5: v1(27.5,30.15) 30.475,27.175 33.343,27.175 v1(33.35,27.182)
NetR95_1: R95.1 U5.6 | length 10.3
  Top Layer w0.5: U5.6@29.05,28.875 v1(30.675,28.875) ; v1(35.075,34.782) 36.004,34.782 R95.1@36.027,34.759
  GND Layer w0.5: v1(30.675,28.875) 30.675,30.382 v1(35.075,34.782)
NetR100_1: R100.1 U7.1 | length 1.7
  Bottom Layer w0.3: U7.1@26.82,19.21 28.515,19.21 R100.1@28.525,19.2
NetR101_1: R101.1 U7.3 | length 1.7
  Bottom Layer w0.3: U7.3@26.82,16.67 28.495,16.67 R101.1@28.525,16.7
NetR102_1: R102.1 U7.5 | length 1.7
  Bottom Layer w0.3: U7.5@26.82,14.13 28.495,14.13 R102.1@28.525,14.1
NetR103_1: R103.1 U7.7 | length 1.7
  Bottom Layer w0.3: U7.7@26.82,11.59 26.83,11.6 R103.1@28.525,11.6
NetR105_1: R105.1 R109.1 U7.16 | length 34.7
  GND Layer w0.3: v1(14.123,44.5) 19.358,44.5 22.3,41.558 22.3,19.673 21.852,19.225 v1(21.825,19.225)
  Bottom Layer w0.3: U7.16@20.6,19.21 20.608,19.218 21.818,19.218 v1(21.825,19.225)
  Bottom Layer w0.5: R109.1@13.375,44.475 13.388,44.487 14.111,44.487 v1(14.123,44.5) ; v1@14.123,44.475 R105.1@14.875,44.475
NetR106_1: R106.1 R110.1 U7.14 | length 39
  GND Layer w0.3: v1(14.123,45.918) 19.231,45.918 22.775,42.375 22.775,17.6 v1(21.825,16.65)
  Bottom Layer w0.3: U7.14@20.6,16.67 20.61,16.66 21.815,16.66 v1(21.825,16.65)
  Bottom Layer w0.5: R110.1@13.375,45.925 R106.1@14.875,45.925
NetR107_1: R107.1 R111.1 U7.12 | length 43.3
  GND Layer w0.3: v1(14.123,47.4) 19.102,47.4 23.275,43.227 23.275,15.575 v1(21.825,14.125)
  Bottom Layer w0.3: U7.12@20.605,14.125 v1(21.825,14.125)
  Bottom Layer w0.5: R111.1@13.375,47.375 13.387,47.387 14.111,47.387 v1(14.123,47.4) ; v1@14.123,47.375 R107.1@14.875,47.375
NetR108_1: R108.1 R112.1 U7.10 | length 47.5
  GND Layer w0.3: v1(14.123,48.818) 19.005,48.818 23.775,44.049 23.775,13.55 v1(21.825,11.6)
  Bottom Layer w0.3: U7.10@20.6,11.59 20.605,11.595 21.695,11.595 v1@21.7,11.6
  Bottom Layer w0.5: R112.1@13.375,48.825 R108.1@14.875,48.825
NetU2_4: U2.4 XP7.2 | length 6.8
  Top Layer w0.3: U2.4@153.525,47.275 153.525,49.225 152.875,49.875 152.875,52.375 XP7.2@153.875,53.375
NetU3_4: U3.4 XP7.4 | length 6.8
  Top Layer w0.3: U3.4@150.225,47.275 150.225,49.225 150.878,49.878 150.878,52.378 XP7.4@151.875,53.375
NetU4_4: U4.4 XP7.6 | length 7.3
  Top Layer w0.3: U4.4@146.925,47.275 146.925,48.725 148.875,50.675 148.875,52.375 XP7.6@149.875,53.375
NetVT1_3: VT1.3 XP6.2 | length 3
  Top Layer w0.3: XP6.2@123.371,2.257 XP6.2@123.396,2.282
  Top Layer w0.5: XP6.2@123.396,2.282 VT1.3@123.396,5.232
NRST: C22.1 DD1.14 XP3.5 | length 23.4
  Top Layer w0.3: C22.1@108.708,20.975 109.82,20.975 XP3.5@110.785,21.94 ; v1(112.1,35.125) DD1.14@112.1,40.525
  Power Layer w0.3: XP3.5@110.785,21.94 111.016,22.171 111.721,22.171 112.76,23.21 113.185,23.21 113.5,23.525 113.5,29.325 112.1,30.725 v1(112.1,35.125)
OSC0: C24.1 DD1.12 ZQ2.1 | length 13.3
  Top Layer w0.3: DD1.12@113.1,40.525 113.1,41.375 117.6,45.875 117.6,49.099 117.424,49.275 ZQ2.1@116.5,49.275 116.4,49.375 C24.1@116.4,50.875
OSC1: C26.1 DD1.13 ZQ2.3 | length 8.4
  Top Layer w0.3: DD1.13@112.6,40.525 112.6,42.75 114.85,45 114.85,46.225 C26.1@114.775,46.3 ; ZQ2.3@114.8,47.975 114.85,47.925 C26.1@114.85,46.375
OSC32_0: C23.1 DD1.8 ZQ1.1 | length 10.5
  Top Layer w0.3: DD1.8@115.1,40.525 115.1,41.675 119.207,45.782 119.207,46.2 119.482,46.475 121.2,46.475 121.45,46.725 ZQ1.1@121.45,47.425
OSC32_1: C25.1 DD1.9 ZQ1.2 | length 15.7
  Top Layer w0.3: DD1.9@114.6,40.525 114.6,41.978 118.3,45.678 118.3,50.575 118.65,50.925 C25.1@119.5,50.925 121.15,50.925 121.45,50.625 ZQ1.2@121.45,49.925
PD1_A: R12A3.2 R13A3.1 XP1.2 | length 10.9
  Top Layer w0.5: R12A3.2@44.05,44.85 v1(44.05,45.662) R13A3.1@44.05,46.475
  Power Layer w0.3: v1(44.05,45.662) 44.05,47.675 46.575,50.2 46.575,52.375 XP1.2@47.625,53.425
PD1_ADC: C33A3.1 DD1.25 R16A3.2 | length 66.4
  Top Layer w0.3: v1(48.45,36.645) v1@48.46,36.635 ; R16A3.2@50.815,36.635 R16A3.2@50.825,36.625 ; v1(104.975,41.15) 106.6,41.15 DD1.25@106.6,40.525
  Top Layer w0.5: v1@48.46,36.635 R16A3.2@50.815,36.635
  Bottom Layer w0.3: v1(48.45,36.645) 52.472,32.623 63.825,32.623 63.926,32.725 85.7,32.725 94.125,41.15 v1(104.975,41.15)
PD1_C: C28A3.2 DA4A3.2 R11A3.1 XP1.1 | length 14.5
  Top Layer w0.5: DA4A3.2@52.75,49.105 52.775,49.13 52.775,52.3 C28A3.2@52.8,52.325 v1(52.8,53.65) 52.819,53.631 56.269,53.631 R11A3.1@56.525,53.375
  Power Layer w0.5: XP1.1@47.625,51.4 50.55,51.4 v1(52.8,53.65)
PD1_ERR: DA5A3.5 DD1.16 | length 70.3
  Top Layer w0.3: v1(54.825,36.725) 54.825,38.114 55.236,38.525 55.775,38.525 DA5A3.5@55.9,38.65 ; DD1.16@111.1,40.525 111.1,39.431 111.425,39.106 v1(111.425,39.025)
  Bottom Layer w0.3: v1(54.825,36.725) 59.625,41.525 81.693,41.525 85.993,45.825 109.449,45.825 110.875,44.399 110.875,42.612 111.425,42.062 v1(111.425,39.025)
PD2_A: R12A2.2 R13A2.1 XP1.5 | length 7.8
  Top Layer w0.5: R12A2.2@42.525,44.85 v1(42.525,45.662) R13A2.1@42.525,46.475
  Power Layer w0.3: v1(42.525,45.662) 42.525,50.325 XP1.5@43.625,51.425
PD2_ADC: C33A2.1 DD1.24 R16A2.2 | length 54.1
  Top Layer w0.3: v1(104.975,41.975) 106.725,41.975 107.1,41.6 DD1.24@107.1,40.525
  Top Layer w0.5: v1(61.175,36.6) 62.05,36.6 C33A2.1@62.075,36.575 ; C33A2.1@62.05,36.625 R16A2.2@63.55,36.625
  Bottom Layer w0.3: v1(61.175,36.6) 63.925,33.85 85.5,33.85 93.625,41.975 v1(104.975,41.975)
PD2_C: C28A2.2 DA4A2.2 R11A2.1 XP1.4 | length 29.2
  Top Layer w0.5: DA4A2.2@65.466,49.105 65.466,52.266 C28A2.2@65.525,52.325 v1(65.525,53.65) 68.9,53.65 R11A2.1@69.225,53.325
  Bottom Layer w0.3: XP1.4@45.625,53.425 46.65,52.4 64.275,52.4 v1(65.525,53.65)
PD2_ERR: DA5A2.5 DD1.17 | length 53.4
  Top Layer w0.3: v1(67.575,36.725) 67.575,38.095 68.005,38.525 68.733,38.525 DA5A2.5@68.883,38.675 ; v1(110.25,41.9) 110.25,41.819 110.6,41.469 DD1.17@110.6,40.525
  Bottom Layer w0.3: v1(67.575,36.725) 69.214,38.364 79.539,38.364 86.325,45.15 109.438,45.15 110.25,44.338 v1(110.25,41.9)
PD3_A: R12A1.2 R13A1.1 XP1.8 | length 10
  Top Layer w0.5: R12A1.2@41,44.85 v1(41,45.65) R13A1.1@41,46.475
  Power Layer w0.3: v1(41,45.65) 40.625,46.025 40.625,52.425 XP1.8@41.625,53.425
PD3_ADC: C33A1.1 DD1.23 R16A1.2 | length 41.6
  Top Layer w0.3: v1(104.975,42.8) 106.881,42.8 107.6,42.081 DD1.23@107.6,40.525
  Top Layer w0.5: v1(73.9,36.6) C33A1.1@74.775,36.6 ; C33A1.1@74.775,36.625 R16A1.2@76.275,36.625
  Bottom Layer w0.3: v1(73.9,36.6) 75.275,35.225 81.125,35.225 83.675,37.775 88.2,37.775 93.225,42.8 v1(104.975,42.8)
PD3_C: C28A1.2 DA4A1.2 R11A1.1 XP1.7 | length 47.2
  Top Layer w0.5: DA4A1.2@78.2,49.105 78.2,52.275 C28A1.2@78.25,52.325 v1(78.25,53.65) 78.269,53.631 81.694,53.631 R11A1.1@81.95,53.375
  Bottom Layer w0.3: XP1.7@41.625,51.425 43.15,49.9 51.345,49.9 52.615,51.17 67.72,51.17 70.2,53.65 v1(78.25,53.65)
PD3_ERR: DA5A1.5 DD1.18 | length 40.9
  Top Layer w0.3: v1(80.325,36.725) 80.325,38.12 80.73,38.525 81.343,38.525 DA5A1.5@81.492,38.675 ; DD1.18@110.1,40.525 110.1,39.45 v1(110.525,39.025)
  Bottom Layer w0.3: v1(80.325,36.725) 88.05,44.45 105.108,44.45 106.296,43.263 106.296,41.979 107.75,40.525 109.025,40.525 v1(110.525,39.025)
PMO_HW: DA19.1 R118.2 XP9.13 | length 14.6
  Top Layer w0.3: XP9.13@3.6,26.5 12.2,26.5 12.684,26.016 12.684,25.621 13.23,25.075 13.23,24.834 13.688,24.376 13.688,23.177 12.883,22.372 12.883,21.625 DA19.1@12.758,21.5
POWER_IND: DD1.1 R52.2 | length 38.6
  Top Layer w0.3: DD1.1@118.6,40.525 118.6,41.224 118.776,41.4 134.1,41.4 139.7,35.8 151.075,35.8 152.6,37.325 R52.2@153.475,37.325
PS_A: DD1.96 DD3.3 | length 39.6
  Top Layer w0.3: DD1.96@120.125,37 121.211,37 121.461,37.25 v1(121.525,37.25)
  Top Layer w0.5: DD3.3@150.675,19.7 v1(150.675,21.675)
  GND Layer w0.3: v1(121.525,37.25) 121.525,36.325 124.875,32.975 134.775,32.975 146.075,21.675 v1(150.675,21.675)
PS_D: DD1.95 DD3.2 | length 40.4
  Top Layer w0.3: DD1.95@120.125,36.5 122.144,36.5 122.219,36.575 v1(122.3,36.575)
  Top Layer w0.5: DD3.2@151.975,19.7 v1(151.975,21.675)
  GND Layer w0.3: v1(122.3,36.575) 124.625,34.25 135.725,34.25 146.55,23.425 150.875,23.425 151.975,22.325 v1(151.975,21.675)
PS_ERR1: DD1.66 DD5.14 | length 26.1
  Top Layer w0.3: v1(114.1,24.202) DD1.66@114.1,25.475 ; v1(136.042,22) v1@136.044,21.998 ; DD5.14@136.044,20.012 DD5.14@136.046,20.01
  Top Layer w0.5: DD5.14@136.044,20.012 v1@136.044,21.998
  GND Layer w0.3: v1(114.1,24.202) 114.102,24.2 133.842,24.2 v1(136.042,22)
PS_ERR2: DD1.67 DD5.13 | length 29.2
  Top Layer w0.3: v1(114.2,26.85) 114.257,26.793 114.257,26.694 114.6,26.351 DD1.67@114.6,25.475 ; v1(137.312,22) v1@137.314,21.998 ; DD5.13@137.314,20.012 DD5.13@137.316,20.01
  Top Layer w0.5: DD5.13@137.314,20.012 v1@137.314,21.998
  GND Layer w0.3: v1(114.2,26.85) 114.2,25.983 115.485,24.698 134.614,24.698 v1(137.312,22)
PS_ERR3: DD1.68 DD5.12 | length 29.5
  Top Layer w0.3: v1(114.95,26.85) 114.95,26.769 115.1,26.619 DD1.68@115.1,25.475
  Top Layer w0.5: DD5.12@138.586,20.01 v1(138.586,22)
  GND Layer w0.3: v1(114.95,26.85) 114.95,26.15 115.906,25.194 135.392,25.194 v1(138.586,22)
PS_ON: DD1.69 DD5.11 R22.2 | length 30.9
  Top Layer w0.3: DD1.69@115.6,25.475 115.6,27.32 v1(115.605,27.325)
  Top Layer w0.5: DD5.11@139.856,20.01 v1(139.856,22)
  GND Layer w0.3: v1(115.605,27.325) 115.605,26.356 116.317,25.644 136.212,25.644 v1(139.856,22)
RD_N: DA15.4 R59.1 R62.2 XS1.6 | length 35.9
  Top Layer w0.3: R62.2@181.275,40.525 181.275,40.575 181.698,40.998 182.379,40.998 183.729,42.347 184.635,42.347 185.25,41.732 185.25,40.806 185.19,40.746 185.19,39.394 185.35,39.234 185.35,38.281 184.806,37.737 184.558,37.737 184.382,37.913 184.382,38.575 XS1.6@184.2,38.757
  Top Layer w0.381: R59.1@181.275,39.025 R62.2@181.275,40.525
  Bottom Layer w0.3: DA15.4@182.15,26.275 182.275,26.15 182.772,26.15 182.948,25.974 182.948,25.346 183.448,24.846 185.646,24.846 187.4,26.6 187.4,30.217 188.892,31.708 188.892,31.762 189.035,31.905 189.035,37.167 188.437,37.764 187.948,37.764 186.955,38.757 XS1.6@184.2,38.757
RD_P: DA15.3 R60.1 R65.2 XS1.4 | length 35
  Top Layer w0.3: R60.1@181.275,43.525 R65.2@181.275,42.025 181.275,41.975 181.698,41.552 182.15,41.552 183.499,42.901 184.864,42.901 185.804,41.962 185.804,40.576 185.69,40.462 185.69,39.601 185.85,39.441 185.85,38.074 185.013,37.237 184.558,37.237 184.382,37.062 184.382,36.4 XS1.4@184.2,36.217
  Bottom Layer w0.3: XS1.4@184.2,36.217 186.955,36.217 187.986,37.249 188.223,37.249 188.519,36.953 188.519,32.119 186.846,30.446 186.846,26.829 185.417,25.4 183.678,25.4 183.502,25.576 183.502,25.974 183.678,26.15 184.175,26.15 DA15.3@184.3,26.275
Rx232: DD1.48 DD14.2 | length 86.5
  Top Layer w0.3: v1(103.125,27.6) 103.525,28 DD1.48@105.075,28
  Top Layer w0.5: v1(25.5,40.8) DD14.2@26.8,40.8
  Power Layer w0.3: v1(25.5,40.8) 35.075,40.8 45.15,30.725 100,30.725 v1(103.125,27.6)
Rx232_HW: DD13.7 XP9.6 | length 15.3
  Top Layer w0.3: v1(8.5,41.8) 8.526,41.8 8.826,42.1 DD13.7@10,42.1
  Bottom Layer w0.3: XP9.6@1.6,34.5 1.985,34.5 2.219,34.267 2.252,34.267 3.019,33.5 5.123,33.5 6.219,34.596 6.219,39.1 8.493,41.374 8.493,41.793 v1(8.5,41.8)
RxCAN: DD1.70 DD6.5 | length 27.8
  Top Layer w0.3: DD1.70@116.1,25.475 116.1,26.619 116.25,26.769 v1(116.25,26.85)
  Bottom Layer w0.3: v1(116.25,26.85) 117.372,25.728 118.812,24.288 136.299,24.288 137.956,22.63 137.956,21.668 138.436,21.188 138.436,20.16 DD6.5@138.586,20.01
RXI_N: DD12.5 R62.1 | length 9.4
  Top Layer w0.3: DD12.5@173.3,36.7 175.031,36.7 176.8,38.469 176.8,40.293 177.465,40.958 178.243,40.958 178.675,40.525 R62.1@179.725,40.525
RXI_P: DD12.6 R65.1 | length 9.5
  Top Layer w0.3: DD12.6@173.3,37.2 174.824,37.2 176.3,38.676 176.3,40.5 177.257,41.458 178.258,41.458 178.825,42.025 R65.1@179.725,42.025
SWCLK: DD1.76 XP3.2 | length 9.4
  Top Layer w0.3: v1(120.125,26.45) DD1.76@120.125,27
  Power Layer w0.3: XP3.2@115.865,19.4 120.125,23.66 v1(120.125,26.45)
SWDIO: DD1.72 XP3.4 | length 8.3
  Top Layer w0.3: XP3.4@113.325,19.4 114.6,20.675 114.6,23.09 115.231,23.721 116.343,23.721 117.1,24.478 DD1.72@117.1,25.475
T1: R19A4.2 R20A4.1 XP1.10 | length 7.5
  Top Layer w0.3: R20A4.1@39.128,47.972 39.128,48.022 38.853,48.297 38.826,48.297 38.65,48.473 38.65,52.45 XP1.10@39.625,53.425
  Top Layer w0.5: R19A4.2@39.078,46.572 39.103,46.597 39.103,47.947 R20A4.1@39.128,47.972
T1_ADC: C37A4.1 DD1.26 R20A4.2 | length 75.6
  Top Layer w0.3: v1(103.125,39) DD1.26@105.075,39
  Top Layer w0.5: v1(37.578,48.997) R20A4.2@37.578,47.972 37.603,47.947 37.603,46.597 C37A4.1@37.628,46.572
  GND Layer w0.3: v1@37.65,49 37.65,46.275 42.125,41.8 100.325,41.8 v1(103.125,39)
T2: R19A5.2 R20A5.1 XP1.12 | length 7.5
  Top Layer w0.3: R20A5.1@36.225,47.975 36.225,49.3 36.702,49.777 36.702,52.502 XP1.12@37.625,53.425
  Top Layer w0.5: R19A5.2@36.175,46.575 36.2,46.6 36.2,47.95 R20A5.1@36.225,47.975
T2_ADC: C37A5.1 DD1.29 R20A5.2 | length 78.8
  Top Layer w0.3: v1(103.125,37.5) DD1.29@105.075,37.5
  Top Layer w0.5: v1(34.675,49) R20A5.2@34.675,47.975 34.725,47.925 C37A5.1@34.725,46.575
  GND Layer w0.3: v1(34.675,49) 34.675,46.925 40.575,41.025 99.6,41.025 v1(103.125,37.5)
TD_N: DA15.6 R57.1 R61.2 XS1.3 | length 25.1
  Top Layer w0.3: R61.2@181.275,32.507 181.454,32.507 181.698,32.751 182.197,32.751 182.5,32.447 182.5,31.599 183.554,30.546 188.046,30.546 189,31.5 189,33.183 188.229,33.954 187.125,33.954 186.949,34.13 186.949,34.738 XS1.3@186.74,34.947
  Top Layer w0.381: R57.1@181.275,30.778 R61.2@181.275,32.277
  Bottom Layer w0.3: DA15.6@182.15,28.175 182.275,28.3 182.772,28.3 182.948,28.476 182.948,29.331 185.25,31.633 185.25,32.812 186.531,34.093 186.531,34.738 XS1.3@186.74,34.947
TD_P: DA15.1 R58.1 R64.2 XS1.1 | length 20.6
  Top Layer w0.3: R64.2@181.275,33.778 181.275,33.728 181.698,33.305 182.426,33.305 183.054,32.676 183.054,31.829 183.783,31.1 187.817,31.1 188.446,31.729 188.446,32.954 188,33.4 187.447,33.4 187.271,33.225 187.271,32.939 XS1.1@186.74,32.407
  Top Layer w0.381: R64.2@181.275,33.778 R58.1@181.275,35.278
  Bottom Layer w0.3: DA15.1@184.3,28.175 184.175,28.3 183.678,28.3 183.502,28.476 183.502,29.102 185.804,31.404 185.804,31.682 185.98,31.857 186.19,31.857 XS1.1@186.74,32.407
Tx232: DD1.47 DD14.3 | length 86.5
  Top Layer w0.3: v1(103.125,28.5) 104.362,28.5 DD1.47@105.075,28.5
  Top Layer w0.5: v1(25.5,42.1) DD14.3@26.8,42.1
  Power Layer w0.3: v1(25.5,42.1) 34.724,42.1 45.499,31.325 100.3,31.325 v1(103.125,28.5)
Tx232_HW: DD13.6 XP9.5 | length 11.6
  Top Layer w0.3: v1@8.481,42.608 9.963,42.608 DD13.6@9.971,42.6
  Bottom Layer w0.3: XP9.5@3.6,34.508 5.082,35.99 5.082,39.246 v1@8.473,42.637
  other v1: 8.481,42.637
TxCAN: DD1.71 DD6.6 | length 28.4
  Top Layer w0.3: DD1.71@116.6,25.475 116.6,26.325 v1(117.125,26.85)
  Bottom Layer w0.3: v1(117.125,26.85) 117.175,26.85 118.06,25.965 119.287,24.738 137.212,24.738 139.231,22.719 139.231,21.753 139.706,21.278 139.706,20.16 DD6.6@139.856,20.01
TXO_N: DD12.2 R61.1 | length 9.4
  Top Layer w0.3: DD12.2@173.3,35.2 174.827,35.2 174.838,35.2 175.042,34.996 175.114,34.924 ; 175.115,34.923 ccw(c175.681,35.488) 176.247,34.923 176.437,35.112 cw(c176.631,34.918) 176.826,35.112 cw(c176.631,34.918) 176.826,34.723 176.636,34.534 ccw(c177.202,33.968) 176.636,33.402 177.033,33.005 177.338,32.7 177.44,32.7 178.2,32.7 178.623,32.277 R61.1@179.725,32.277
TXO_P: DD12.3 R64.1 | length 9.5
  Top Layer w0.3: DD12.3@173.3,35.7 175.045,35.7 175.186,35.559 175.396,35.349 175.469,35.276 ccw(c175.681,35.488) 175.893,35.276 176.083,35.466 cw(c176.631,34.918) 177.179,35.466 cw(c176.631,34.918) 177.181,34.371 176.989,34.18 ccw(c177.202,33.968) 176.989,33.756 177.387,33.359 177.545,33.2 177.94,33.2 178.2,33.2 178.778,33.778 R64.1@179.725,33.778
XSCI: DD12.12 R68.2 R70.1 | length 11
  Top Layer w0.3: R70.1@169.3,47.2 169.3,45.5 169.9,44.9 R68.2@171.025,44.9 171.149,44.776 171.149,44.151 171.5,43.8 172.934,43.8 173.9,42.834 173.9,40.2 DD12.12@173.3,40.2
XSCO: C84.1 DD12.11 R68.1 ZQ3.1 | length 11.4
  Top Layer w0.3: DD12.11@173.3,39.7 174.345,39.7 174.665,40.02 174.665,43.535 173.3,44.9 R68.1@172.575,44.9 172.575,46.575 ZQ3.1@172.7,46.7 172.7,46.75 173.15,47.2 C84.1@174.375,47.2
pads on no net: DA1.3 DA1.5 DA1.8 DA2.5 DA2.8 DA4A1.5 DA4A2.5 DA4A3.5 DA17.3 DA17.5 DA17.8 DD1.51 DD1.52 DD1.54 DD1.65 DD1.83 DD1.84 DD1.85 DD1.86 DD1.87 DD1.97 DD1.98 DD4.1 DD6.1 DD6.4 DD6.10 DD6.14 DD6.15 DD7A7.1 DD7A8.1 DD8A7.1 DD8A8.1 DD9A7.7 DD9A7.11 DD9A8.7 DD9A8.11 DD11.1 DD12.18 DD12.19 DD12.21 DD12.34 DD12.35 DD12.37 DD12.38 DD12.39 DD12.40 DD12.41 DD12.42 DD12.43 DD12.44 DD15.7 XP1.14 XP3.6 XP7.7 XP7.8 XS1. XS1.7 XS1.8

## Polygon pours and split planes (outlines as drawn)
GND on Top Layer "GND_L01_P006" (solid, remove dead copper, pour order 6): 190.825,15.875 190.825,22.125 193.2,24.5 200,24.5 200,45.497 193,45.497 190.5,47.997 190.5,54.997 158.75,54.997 158.75,45.75 155.5,42.5 146.25,42.5 143,45.75 143,55 104.375,55 104.375,48.375 102,46 97.875,46 95.5,48.375 95.5,55 90.625,55 90.625,35.25 94.917,30.958 94.917,17.95 94.917,17.5 94.917,17.434 104.375,7.976 104.375,0 128.5,0 128.5,13.5 133,18 152,18 159.925,18 164.175,13.75 181.425,13.75 183.55,15.875
AGND on Top Layer "AGND_L01_P017" (solid, remove dead copper, pour order 17): 34,55 34,22.275 38.275,18 93,18 93,30.5 88.375,35.125 88.375,55
GND on Top Layer "NONET_L-01_P-001" (solid, remove dead copper, pour order 24): 25.5,55 32,55 32,9.3 25.5,9.3
GND_DRVA7 on Top Layer "GND_DRVA7_L01_P023" (solid, remove dead copper, pour order 23): 66.75,15.5 66.75,0 88.125,0 88.125,15.5
GND_DRVA8 on Top Layer "GND_DRVA8_L01_P022" (solid, remove dead copper, pour order 22): 39.75,15.5 36.325,12.075 36.325,0 58,0 58,15.5
GND_HW on Top Layer "GND_HW_L01_P008" (solid, remove dead copper, pour order 8): 9,0 9,6.5 6.5,9 0,9 0,46 6,46 9,49 9,55 22,55 22,7.545 17.55,3.095 17.55,0
GND_FS on Top Layer "NONET_L-01_P-001" (solid, remove dead copper, pour order 25): 164.175,11 162.5,9.325 162.5,0 174.25,0 174.25,11
GND_PS on Top Layer "GND_PS_L01_P013" (solid, remove dead copper, pour order 13): 131.125,0 131.125,13.25 133.375,15.5 155.081,15.5 155.081,0
AGND_HW on Top Layer "NONET_L-01_P-001" (solid, pour order 21): 12.566,29.195 12.566,27.056 13.496,26.126 16.874,26.126 16.874,24.87 18.098,24.87 18.098,26.126 19.253,27.28 19.253,29.195
GND on Bottom Layer "GND_L04_P009" (solid, remove dead copper, pour order 9): 200,24.5 193.2,24.5 190.61,21.91 178.96,21.91 174.25,17.2 174.25,13.75 164.175,13.75 159.925,18 133,18 128.5,13.5 128.5,0 104.4,0 104.4,7.95 94.35,18 38.374,18 33,12.626 33,9.3 25.5,9.3 25.5,19 25.5,55 32,55 32,26.5 82.5,26.5 90.625,34.625 90.625,55 95.5,55 95.5,48.375 97.877,45.998 101.998,45.998 104.375,48.375 104.375,55 143,55 143,45.75 146.25,42.5 155.5,42.5 158.75,45.75 158.75,55 190.5,55 190.5,49 193.502,45.998 200,45.998
GND_DRVA7 on Bottom Layer "GND_DRVA7_L04_P001" (solid, remove dead copper, pour order 1): 66.75,15.5 66.75,0.003 88.125,0.003 88.125,15.5
AGND on Bottom Layer "AGND_L04_P005" (solid, remove dead copper, pour order 5): 34,55 34,28.5 52.499,28.5 73.5,28.5 82.25,28.5 88.375,34.625 88.375,55
GND_DRVA8 on Bottom Layer "GND_DRVA8_L04_P003" (solid, remove dead copper, pour order 3): 39.75,15.5 36.325,12.075 36.325,0 58,0 58,15.5
GND_HW on Bottom Layer "GND_HW_L04_P015" (solid, remove dead copper, pour order 15): 9,0 9,6.5 6.5,9 0,9 0,46 6,46 9,49 9,55 22,55 22,8.75 18.788,8.75 17.55,7.512 17.55,0
GND_FS on Bottom Layer "NONET_L-01_P-001" (solid, remove dead copper, pour order 19): 164.175,11 162.5,9.325 162.5,0 174.25,0 174.25,11
GND_PS on Bottom Layer "GND_PS_L04_P012" (solid, remove dead copper, pour order 12): 131.125,0 131.125,13.25 133.375,15.5 155.081,15.5 155.081,0
GND on GND Layer "GND_L03_P018" (solid, remove dead copper, pour order 18): 25.5,55 32,55 32,26.5 50.2,26.5 52.65,28.95 84.95,28.95 90.626,34.626 90.626,55 95.5,55 95.5,48.375 97.877,45.998 101.998,45.998 104.375,48.375 104.375,55 143,55 143,45.744 146.247,42.497 155.497,42.497 158.75,45.75 158.75,55 190.5,55 190.5,49 193.502,45.998 200,45.998 200,24.5 193.175,24.5 190.825,22.15 190.825,15.875 183.55,15.875 181.425,13.75 164.175,13.75 159.925,18 133,18 128.5,13.5 128.5,0 104.4,0 104.4,7.95 94.35,18 38.51,18 33,12.49 33,9.3 25.5,9.3
AGND on GND Layer "AGND_L03_P004" (solid, remove dead copper, pour order 4): 34,55 34,28.5 82.25,28.5 88.375,34.625 88.375,55
GND_FS on GND Layer "NONET_L-01_P-001" (solid, remove dead copper, pour order 20): 164.175,11 162.5,9.325 162.5,0 174.25,0 174.25,11
GND_DRVA7 on GND Layer "GND_DRVA7_L03_P000" (solid, remove dead copper, pour order 0): 66.75,14.25 66.75,0 88.125,0 88.125,14.25
GND_DRVA8 on GND Layer "GND_DRVA8_L03_P002" (solid, remove dead copper, pour order 2): 38.5,14.25 36.325,12.075 36.325,0 58,0 58,14.25